# Altium PCB RobotCtrl_Base_Power.PcbDoc
Units mm, origin at the board's own origin, x right, y up, seen from the top; angles counter-clockwise.
Board outline 100 x 100 mm, 2 copper layers (Top Layer, Bottom Layer); 21 components, 7 nets, 71 pads, 82 vias.
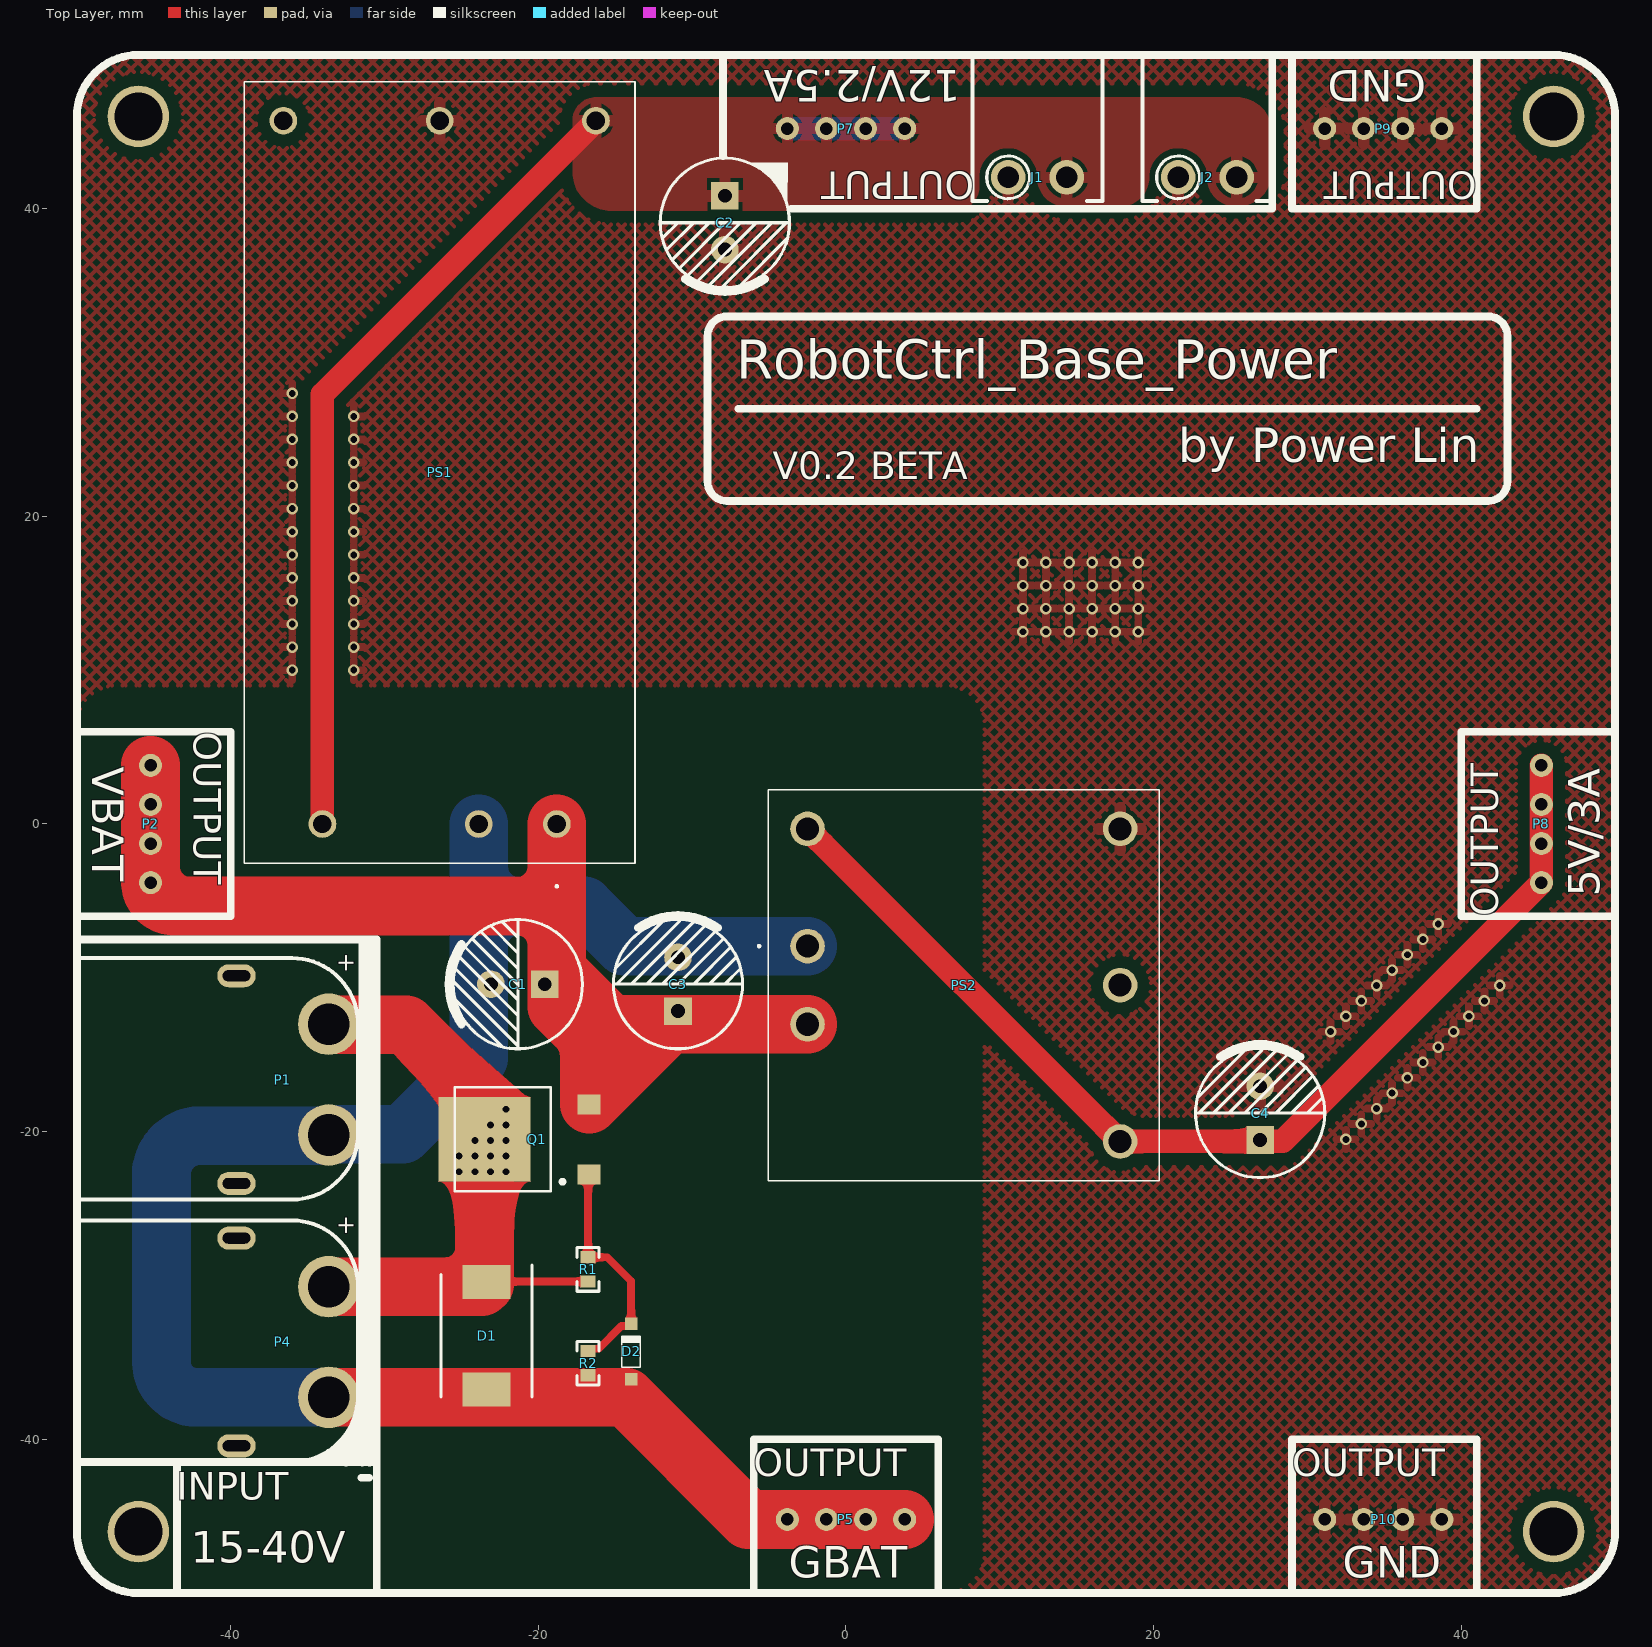
[diagram p0: Top Layer view]
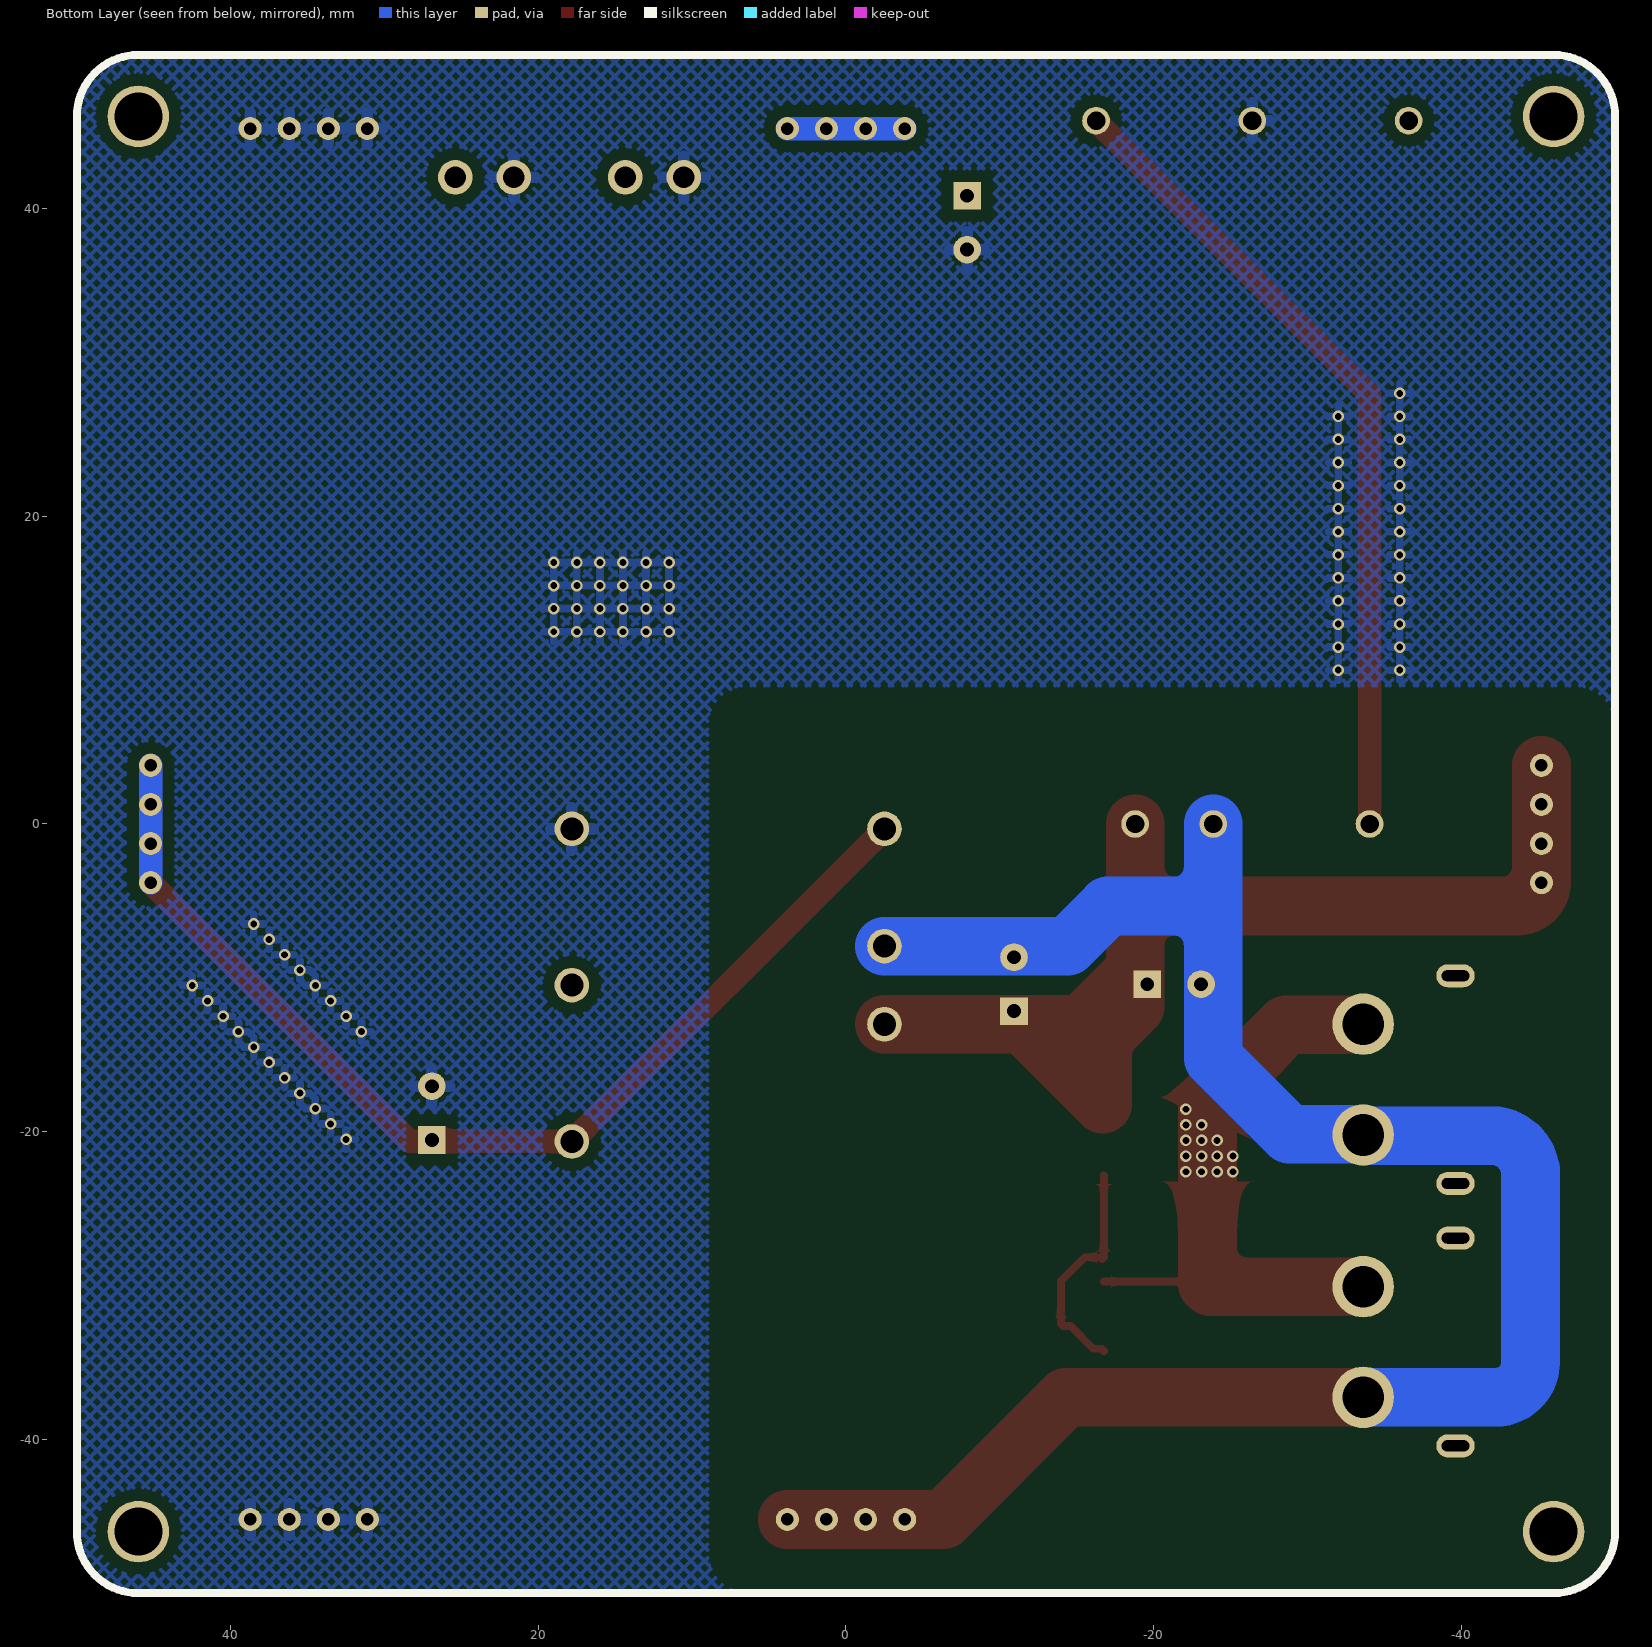
[diagram p1: Bottom Layer view, seen from below]
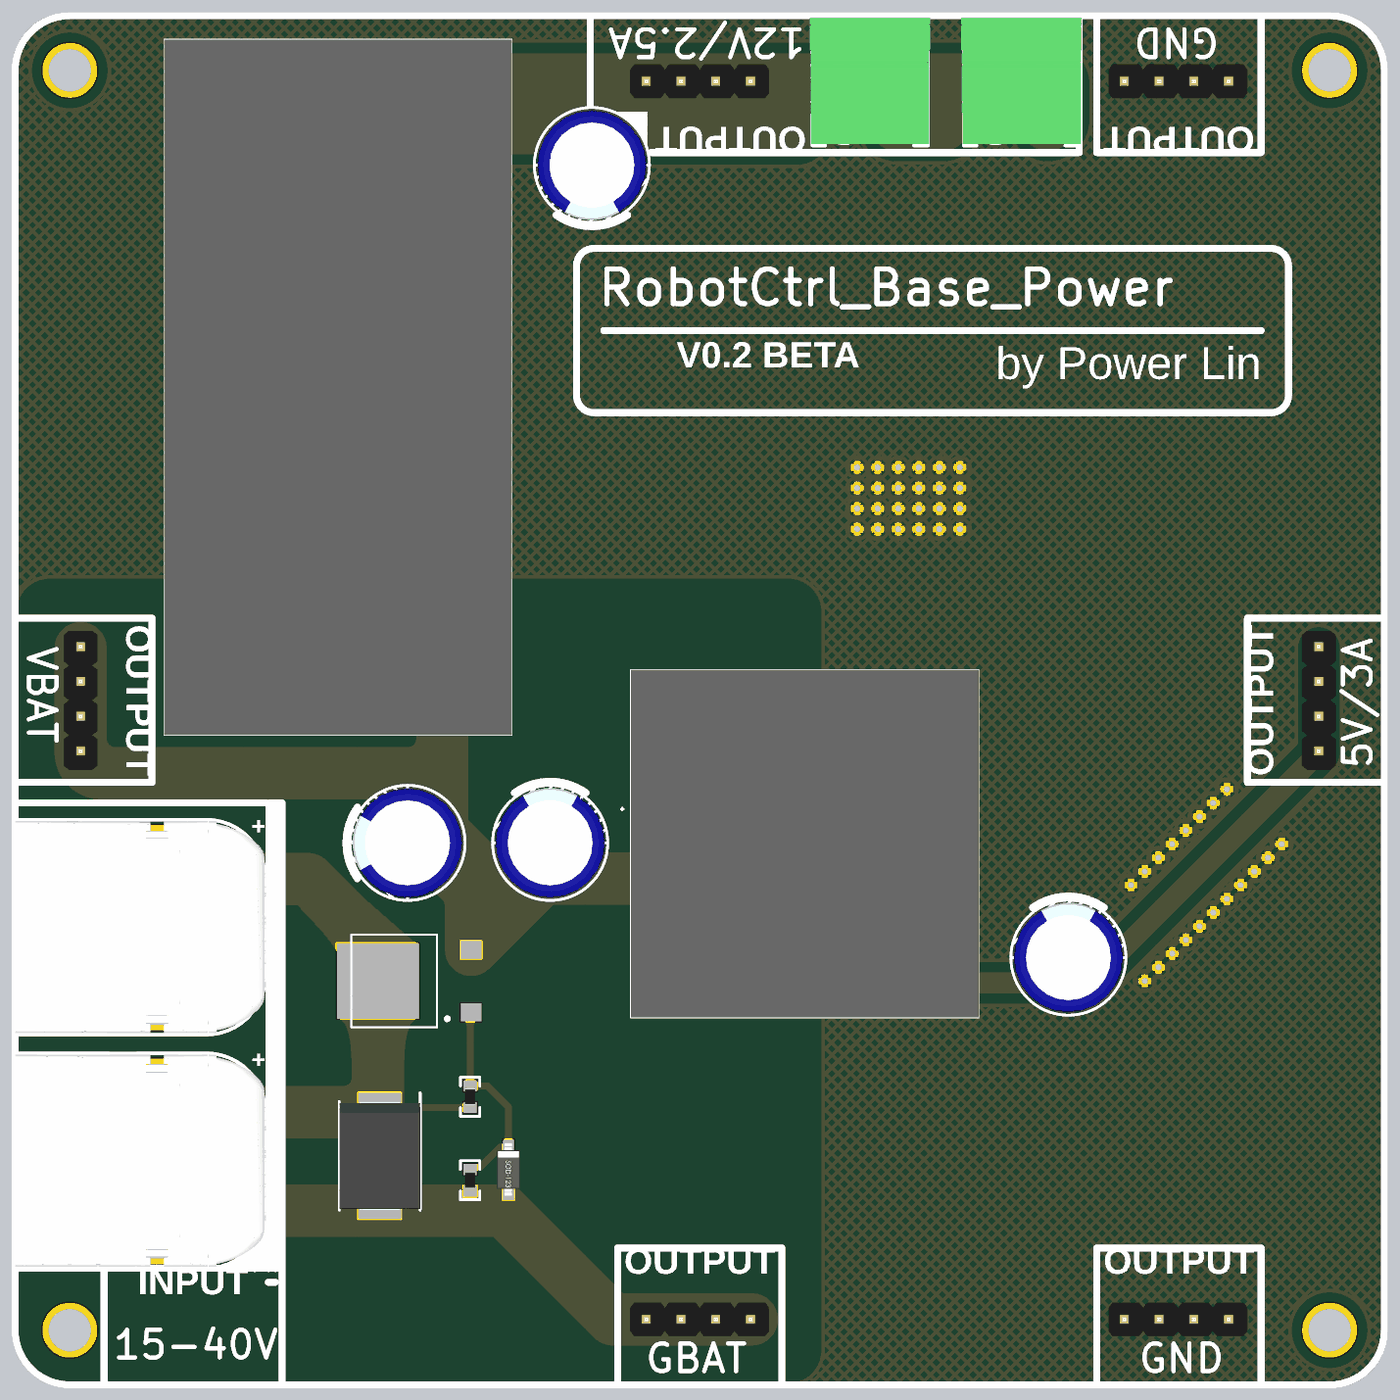
[diagram p2: 3D render of the assembled board from above, using the file's embedded part models]

## Layer stack, top to bottom
Top Solder: solder mask 0.0102, Solder Resist, Dk 3.5
Top Layer: signal copper 0.0356
Dielectric 1: dielectric 0.32, FR-4, Dk 4.8
Bottom Layer: signal copper 0.0356
Bottom Solder: solder mask 0.0102, Solder Resist, Dk 3.5

## Board outline
-50,-46 -50,46 cw(c-46,46) -46,50 46,50 cw(c46,46) 50,46 50,-46 cw(c46,-46) 46,-50 -46,-50 cw(c-46,-46)

## Design rules (kind name [scope] priority, off if disabled: settings)
Clearance [All] p1: gap=0.254 ignorepadtopadclearanceinfootprint=FALSE except(0: Arc-Hole Track-Hole SMDPad-Hole THPad-Hole Via-Hole Fill-Hole Poly-Hole Region-Hole Text-Hole; 0.762: Arc-Fill Arc-Poly Arc-Region Track-Fill Track-Poly Track-Region SMDPad-Fill SMDPad-Poly SMDPad-Region THPad-Fill THPad-Poly THPad-Region Via-Fill Via-Poly Via-Region Fill-Fill Fill-Poly Fill-Region Poly-Poly Poly-Region Region-Region)
PlaneConnect [All] p1: planeconnectstyle=Direct reliefexpansion=0.508 reliefentries=4 reliefconductorwidth=0.508 reliefairgap=0.254
PolygonConnect [All] p1: thpad.connectstyle=Relief thpad.reliefconductorwidth=0.762 thpad.reliefentries=4 thpad.polygonreliefangle="90 Angle" thpad.airgapwidth=0.254 smdpad.connectstyle=Relief smdpad.reliefconductorwidth=0.508 smdpad.reliefentries=4 smdpad.polygonreliefangle="90 Angle" smdpad.airgapwidth=0.254 via.connectstyle=Relief via.reliefconductorwidth=0.508 via.reliefentries=4 via.polygonreliefangle="90 Angle" via.airgapwidth=0.254
RoutingVias [All] p1: holewidth=0.45 width=0.75 viastyle="Through Hole" minholewidth=0.45 minwidth=0.75 maxholewidth=0.45 maxwidth=0.75
SolderMaskExpansion [All] p1: expansion=0.102 istentingtop=FALSE
Width [All] p1: maxlimit=5.08 minlimit=0.254 preferedwidth=0.254
29 further rules are at their usual default settings.

## Components (designator, comment, footprint, x,y, rotation, side; value= is the part's Value field where it differs from the comment)
C1 "100uF/63V" "CAP 3.5*8*11.5" -21.336,-10.414 r180 top
C2 "100uF/63V" "CAP 3.5*8*11.5" -7.874,39.088 r270 top
C3 "100uF/63V" "CAP 3.5*8*11.5" -10.922,-10.414 r90 top
C4 "100uF/63V" "CAP 3.5*8*11.5" 26.924,-18.796 r90 top
D1 "TPSMCJ30CA" DO-214AB/SMC -23.368,-33.274 r270 top
D2 "MMSZ5240B" SOD_123 -13.97,-34.29 r270 top
J1 "KF2EDGR-3.81-2P" "FCI 06-381-2PIN" 12.446,42.037 r0 top
J2 "KF2EDGR-3.81-2P" "FCI 06-381-2PIN" 23.495,42.037 r0 top
P1 "XT60" XT60PW-M -33.624,-20.218 r90 top
P2 "HDR1x4_2.54" HDR1x4_2.54_180 -45.212,3.81 r0 top
P4 "XT60" XT60PW-M -33.624,-37.274 r90 top
P5 "HDR1x4_2.54" HDR1x4_2.54_180 -3.81,-45.212 r90 top
P7 "HDR1x4_2.54" HDR1x4_2.54_180 -3.81,45.212 r90 top
P8 "HDR1x4_2.54" HDR1x4_2.54_180 45.212,3.81 r0 top
P9 "HDR1x4_2.54" HDR1x4_2.54_180 31.115,45.212 r90 top
P10 "HDR1x4_2.54" HDR1x4_2.54_180 31.115,-45.212 r90 top
PS1 "URB2412LD-30WR3" URB2412LD30WR3 -18.796,0 r90 top
PS2 "URB2405YMD-15WR3" URB2405YMD15WR3 -2.5,-7.938 r90 top
Q1 "NCE40P70K" TO-252 -16.7,-22.79 r180 top
R1 "10k" R-0603 -16.764,-28.956 r90 top
R2 "20k" R-0603 -16.764,-35.052 r270 top

## Footprints (in the part's own frame and the unit in brackets; to place one, negate y for a bottom-side part, rotate by r counter-clockwise, add the part's x,y. Pads: shape width x height; smd on the part's side, far side on the other; paste and mask are expansions set on the pad)
"CAP 3.5*8*11.5" [mm] "锟脚撅拷3.5mm直锟斤拷8mm锟竭讹拷11.5mm"
  rect 1.8x1.8 hole 0.9: 1(-1.75,0)
  round 1.8 hole 0.9: 2(1.75,0)
  silkscreen extent -4.2,-4.2 4.5,4.2, body extent -4,-4 4.01,4, height 11.53
DO-214AB/SMC [mm]
  rect 2.2x3.1 smd: 1(3.5,0) 2(-3.5,0)
  silkscreen extent -4.6,-2.95 3.97,2.95, body extent -3.97,-2.95 3.97,2.95, height 2.5
"FCI 06-381-2PIN" [mm] "FCI Pluggable Terminal Block"
  round 2.25 hole 1.4: 1(-1.905,0) 2(1.905,0)
  silkscreen extent -4.22,-1.52 4.22,7.87, body extent -4.4,-1.4 4.4,7.8, height 7.6
HDR1x4_2.54_180 [mm]
  round 1.5 hole 0.813: 1(0,0) 2(0,-2.54) 3(0,-5.08) 4(0,-7.62)
  body extent -1.25,-8.89 1.25,1.27, height 8.2
R-0603 [mm]
  rect 0.8x0.96 smd: 1(-0.79,0) 2(0.79,0)
  silkscreen extent -1.42,-0.71 1.42,0.71, body extent -0.76,-0.38 0.76,0.38, height 0.41
SOD_123 [mm]
  rect 0.8x0.8 smd: 1(1.8,0) 2(-1.8,0)
  silkscreen extent -1.02,-0.6 1.02,0.6, body extent -1.95,-0.85 1.9,0.85, height 1.42
TO-252 [mm] "锟斤拷片MOS锟斤拷"
  rect 1.5x1.3 smd: 1(0,0) 2(0,-4.56)
  rect 6x5.5 smd: 3(6.8,-2.29)
  silkscreen extent 1.61,-5.66 8.74,1.09, body extent -0.56,-5.65 9.54,1.08, height 2.37
URB2405YMD15WR3 [mm]
  round 2.25 hole 1.5: 1(7.62,0) 2(0,0) 3(-5.08,0) 4(-12.7,-20.32) 5(-2.54,-20.32) 6(7.62,-20.32)
  silkscreen extent -15.24,-22.86 10.16,3.2, body extent -15.24,-22.86 10.16,2.54, height 12.3
URB2412LD30WR3 [mm]
  round 1.8 hole 1.2: 1(0,15.24) 2(0,5.08) 3(0,0) 4(45.72,-2.54) 5(45.72,7.62) 6(45.72,17.78)
  silkscreen extent -4.1,-5.08 48.26,20.32, body extent -2.54,-5.08 48.26,20.32, height 16.9
XT60PW-M [mm]
  oval 1.5x2.5 hole 0.7 slot 1.8 at 90 deg: 0(-3.15,6) 0(10.35,6)
  round 4 hole 2.7: 1(7.2,0) 2(0,0)
  silkscreen extent -4.2,-1.9 11.5,16.3, body extent -4.3,-1.95 11.6,16.35, height 8.45

## Part data
C1 C2 C3 C4: library part CAP-POL, "ECR1JBK101MLL080011 / https://list.szlcsc.com/catalog/312.html?%26%7C%7C%3D%7B%22param_13003_n%22%3A%5B%22100uF%22%5D%2C%22param_13005_n%22%3A%5B%22range-60V~%22%5D%2C%22queryProductStandard%22%3A%5B%22%E5%BE%84%E5%90%91%E5%BC%95%E7%BA%BF%2C8x11.5mm%22%5D%7D%7C%7C", Package=3528, SuppliersPartNumber=C16133, ComponentLink1Description=供应商链接, ComponentLink1URL=http://www.szlcsc.com/product/details_16815.html, Supplier=LC
D1: library part TVS_C
D2: library part DIODE, "稳压 10V", Package=SMA(DO-214AC), SuppliersPartNumber=C22452, ComponentLink1Description=供应商链接, ComponentLink1URL=http://www.szlcsc.com/product/details_23178.html, Supplier=LC
J1 J2: "TERM BLOCK HDR 2POS 90DEG 3.81MM", Color=Green, Current - UL=10A, Manufacturer="Amphenol Anytek", Manufacturer Part Number=OQ0232510000G, Operating Temperature="-40°C ~ 115°C", Voltage - UL=300V, Component Type=接线端子, ComponentLink1Description=Datasheet, ComponentLink1URL=http://portal.fciconnect.com/Comergent//fci/drawing/oqxx32x100j0g.pdf, Contact Mating Finish=Tin, Header Orientation="90°, Right Angle", LastUpdated="2019-12-16 19:14:30.110", Lifecycle Status=0, Minimum Order=1, Mounting Type="Through Hole", Number of Levels=1, Number of Positions=2, Packaging=Bulk, Part Number=OQ0232510000G, Part Status=Active, Pitch="0.150\" (3.81mm)", Positions Per Level=2, Price=0.49, Series=06-381, Termination Style=Solder, Type="Header, Male Pins, Shrouded (4 Side)"
P1 P4: library part XT30/60
P2 P5 P7 P8 P9 P10: "Header"
  P7 P8 P9 P10: System=Connector
PS1: "金升阳隔离电源", Manufacturer_Name=Mornsun, Manufacturer_Part_Number=URB2412LD-30WHR3, Datasheet Link=https://4donline.ihs.com/images/VipMasterIC/IC/MNSN/MNSN-S-A0002273855/MNSN-S-A0002273855-1.pdf?hkey=EF798316E3902B6ED9A73243A3159BB0, Height=16.8mm
PS2: "金升阳隔离电源", Manufacturer_Name=Mornsun, Manufacturer_Part_Number=URB2405YMD-10WR3, Datasheet Link=https://www.mornsun-power.com/html/pdf/URB2405YMD-10WR3.html, Height=12.2mm
Q1: library part P-MOS, Case/Package=SOT23-3, Manufacturer="NCE Power", Package Description="3-Pin Small Outline Transistor, Body 2.9 x 1.3 mm, Pitch 0.95 mm", Component Type=Transistors, Datasheet URL=http://www.ncepower.com/Upload/MOSFET/mos1/55vpmos/NCE3407Adatasheet-17275285683.pdf, Datasheet Version="Rev. 1.1, 07/2014", Mounting Technology=SM, Package Reference=SOT23-3, RoHS Compliant=Unknown
R1 R2: library part RES, "贴片电阻", Package=0805, SuppliersPartNumber=C17798, Supplier=LC

## Free pads (board coordinates)
  round 4 hole 3.1: 2(-46,-46) 2(-46,46) 2(46,-46) 2(46,46)

## Via types
v1: diameter 0.75, hole 0.45, Top Layer to Bottom Layer, 82 vias

## Nets (pads, with @x,y where several pads share a name; then routed paths per layer and width w, separated by ;. In a path a pad name is that pad's centre, name@x,y a point inside that pad or via, vN(x,y) a via of type N, cw(c..) or ccw(c..) an arc to the next point about the centre after c; other vN are vias at no path point)
GBAT: C1.2 C3.2 D1.1 D2.1 P1.2 P4.2 P5.1 P5.2 P5.3 P5.4 PS1.2 PS2.2 R2.2 | length 171.4
  Top Layer w0.508: D1.1 -22.522,-35.928 -21.888,-35.928 -21.774,-35.814 -18.288,-35.814 ; R2.2@-16.91,-35.988 R2.2 R2.2@-16.761,-35.839 ; D2.1@-13.973,-36.093 D2.1
  Top Layer w3.81: P1.2@-33.66,-20.254 P1.2 ; D1.1@-22.522,-37.274 P4.2 ; -18.288,-37.274 P4.2 ; P5.4 P5.3 P5.2 P5.1 -6.35,-45.212 -14.288,-37.274 P4.2
  Bottom Layer w3.81: -38.862,-20.254 -41.96,-20.254 ; P4.2 -42.226,-37.274 cw(c-42.226,-35) -44.5,-35 -44.5,-22.794 ; PS1.2 -23.876,-2.794 ; PS2.2 -14.414,-7.938 -17.018,-5.334 -21.336,-5.334 ; -44.5,-22.794 cw(c-41.96,-22.794) -44.479,-22.465 ; -44.5,-22.794 -44.5,-22.486 -44.479,-22.465 ; -44.479,-22.465 cw(c-41.96,-22.794) -42.29,-20.276 ; -42.29,-20.276 cw(c-41.96,-22.794) -41.96,-20.254 ; -42.29,-20.276 -42.268,-20.254 -41.96,-20.254 ; -41.96,-20.254 -33.66,-20.254 P1.2 -33.588,-20.182 -28.818,-20.182 -23.876,-15.24 -23.876,-7.874 ; -23.876,-7.874 cw(c-21.336,-7.874) -21.336,-5.334 ; -23.876,-7.874 -23.876,-6.528 ; -23.876,-6.528 -23.876,-2.794 ; -23.876,-6.528 -22.682,-5.334 -21.336,-5.334 ; -23.876,-2.794 ccw(c-21.336,-2.794) -21.336,-5.334
GND: C2.2 C4.2 J1.1 J2.1 P9.1 P9.2 P9.3 P9.4 P10.1 P10.2 P10.3 P10.4 PS1.5 PS2.6
  other v1: 32.5,-20.5 33.5,-19.5 34.5,-18.5 35.5,-17.5 36.5,-16.5 37.5,-15.5 38.5,-14.5 31.5,-13.5 39.5,-13.5 32.5,-12.5 40.5,-12.5 33.5,-11.5 41.5,-11.5 34.5,-10.5 42.5,-10.5 35.5,-9.5 36.5,-8.5 37.5,-7.5 38.5,-6.5 -36,10 -32,10 -36,11.5 -32,11.5 11.5,12.5 13,12.5 14.5,12.5 16,12.5 17.5,12.5 19,12.5 -36,13 -32,13 11.5,14 13,14 14.5,14 16,14 17.5,14 19,14 -36,14.5 -32,14.5 11.5,15.5 13,15.5 14.5,15.5 16,15.5 17.5,15.5 19,15.5 -36,16 -32,16 11.5,17 13,17 14.5,17 16,17 17.5,17 19,17 -36,17.5 -32,17.5 -36,19 -32,19 -36,20.5 -32,20.5 -36,22 -32,22 -36,23.5 -32,23.5 -36,25 -32,25 -36,26.5 -32,26.5 -36,28
NetD1_2: D1.2 P1.1 P4.1 Q1.3 R1.1 | length 46.6
  Top Layer w0.508: D1.2@-23.5,-29.906 D1.2 -23.34,-29.746 R1.1
  Top Layer w3.81: P4.1 -26.04,-30.074 ; P1.1 -33.588,-13.054 -28.602,-13.054 -23.5,-18.156 Q1.3 -23.5,-27.534 ; -23.5,-25.908 -23.5,-27.534 ; -26.04,-30.074 ccw(c-26.04,-27.534) -23.5,-27.534 ; -26.04,-30.074 -23.668,-30.074 -23.5,-29.906 -23.5,-27.534
  other v1: -25.146,-22.606 -24.13,-22.606 -23.114,-22.606 -22.098,-22.606 -25.146,-21.59 -24.13,-21.59 -23.114,-21.59 -22.098,-21.59 -24.13,-20.574 -23.114,-20.574 -22.098,-20.574 -23.114,-19.558 -22.098,-19.558 -22.098,-18.542
NetD2_2: D2.2 Q1.1 R1.2 R2.1 | length 15.3
  Top Layer w0.381: Q1.1@-16.764,-22.854 Q1.1
  Top Layer w0.508: R2.1 -16.618,-34.116 -16.082,-34.116 -14.602,-32.636 -14.116,-32.636 D2.2 -13.97,-29.718 -15.522,-28.166 R1.2 ; Q1.1@-16.764,-22.854 R1.2 ; R1.2@-16.66,-28.27 R1.2
VBAT: C1.1 C3.1 P2.1 P2.2 P2.3 P2.4 PS1.3 PS2.3 Q1.2 | length 100.9
  Top Layer w3.81: P2.1 P2.2 P2.3 -45.212,-2.794 ; -39.116,-5.334 -42.672,-5.334 ; PS1.3 -18.796,-2.794 ; PS2.3 C3.1@-11.684,-13.018 ; -45.212,-2.794 ccw(c-42.672,-2.794) -42.672,-5.334 ; -45.212,-2.794 P2.4 ccw(c-43.688,-3.81) -43.688,-5.334 -42.672,-5.334 ; -42.672,-5.334 -21.336,-5.334 ; -21.336,-5.334 ccw(c-21.336,-2.794) -18.796,-2.794 ; -21.336,-5.334 cw(c-21.336,-7.874) -18.796,-7.874 ; -21.336,-5.334 -18.796,-5.334 ; C1.1@-18.796,-9.526 -18.796,-7.874 ; C1.1@-18.796,-9.526 -15.304,-13.018 ; C1.1@-18.796,-9.526 -18.796,-11.874 -17.652,-13.018 ; -18.796,-7.874 -18.796,-5.334 ; -18.796,-5.334 -18.796,-2.794 ; -17.652,-13.018 -17.444,-13.226 ; -17.652,-13.018 -15.304,-13.018 ; -17.444,-13.226 cw(c-19.24,-15.022) -16.7,-15.022 ; -17.444,-13.226 -16.7,-13.97 -16.7,-14.414 ; -16.7,-15.022 -16.7,-14.414 ; -16.7,-15.022 Q1.2 -11.684,-13.214 C3.1@-11.684,-13.018 ; -16.7,-14.414 -15.304,-13.018 ; -15.304,-13.018 C3.1@-11.684,-13.018
VCC_5V: C4.1 P8.1 P8.2 P8.3 P8.4 PS2.1 PS2.4 | length 78.3
  Top Layer w1.524: PS2.1 PS2.4 26.416,-20.638 28.384,-20.638 P8.4 P8.3 P8.2 P8.1
  Bottom Layer w1.524: P8.4 P8.3 P8.2 P8.1
VCC_12V: C2.1 J1.2 J2.2 P7.1 P7.2 P7.3 P7.4 PS1.1 PS1.4 | length 60.7
  Top Layer w1.524: PS1.1 -34.036,27.94 PS1.4
  Bottom Layer w1.524: P7.1 P7.2 P7.3 P7.4
pads on no net: P1.0 P4.0 PS1.6 PS2.5

## Polygon pours and split planes (outlines as drawn)
VCC_12V on Top Layer "NONET_L01_P-001" (solid, remove dead copper, pour order 3): 8.654,41.42 cw(c7.112,41.42) 7.112,39.878 -15.24,39.878 cw(c-15.24,42.418) -17.78,42.418 -17.78,45.72 cw(c-16.256,45.72) -16.256,47.244 25.4,47.244 cw(c25.4,44.958) 27.686,44.958 27.686,42.418 cw(c25.4,42.418) 25.4,40.132 25.382,40.132 cw(c25.382,42.037) 23.477,42.037 19.703,42.037 cw(c17.798,42.037) 17.798,40.132 14.333,40.132 cw(c14.333,42.037) 12.428,42.037 8.654,42.037
GND on Top Layer "NONET_L01_P-001" (hatched 45Degree grid 0.635 track 0.254, remove dead copper, pour order 0): -46,50 ccw(c-46,46) -50,46 -50,-46 ccw(c-46,-46) -46,-50 46,-50 ccw(c46,-46) 50,-46 50,46 ccw(c46,46) 46,50
GND on Bottom Layer "NONET_L01_P-001" (hatched 45Degree grid 0.635 track 0.254, remove dead copper, pour order 2): -46,50 ccw(c-46,46) -50,46 -50,-46 ccw(c-46,-46) -46,-50 46,-50 ccw(c46,-46) 50,-46 50,46 ccw(c46,46) 46,50

## Other copper
Top Layer:
  pour cut-out: -49.994,-47.454 ccw(c-47.454,-47.454) -47.454,-49.994 6.466,-49.994 ccw(c6.466,-47.454) 9.006,-47.454 9.006,6.466 ccw(c6.466,6.466) 6.466,9.006 -47.454,9.006 ccw(c-47.454,6.466) -49.994,6.466
Bottom Layer:
  pour cut-out: 9.006,-47.454 cw(c6.466,-47.454) 6.466,-49.994 -47.454,-49.994 cw(c-47.454,-47.454) -49.994,-47.454 -49.994,6.466 cw(c-47.454,6.466) -47.454,9.006 6.466,9.006 cw(c6.466,6.466) 9.006,6.466

## Silkscreen, mask and mechanical layers (free items; w line width, h text height)
Top Overlay:
  rectangle: -6.096,42.926 -3.809,43
  region: -4.964,42.973 -3.81,42.926 -3.793,42.972 -3.81,40.386 ccw(c-4.423,40.386) -3.99,40.82 -4.064,40.894 ccw(c-4.677,40.894) -4.244,41.328 -5.662,42.746 ccw(c-6.096,42.313) -6.096,42.926
  lines w0.508: -50,-7 -50,-7.5 -30.5,-7.5 -30.5,-50 ; -50,-6 -40,-6 -40,6 -50,6 ; -43,-50 -43.5,-50 -43.5,-41.474 -49.924,-41.474 -30.5,-41.474 ; -34.25,-41.25 -33.02,-41.25 ccw(c-33.02,-39.98) -31.75,-39.98 -31.75,-38.5 ; -32.5,-41.5 ccw(c-32.5,-40.5) -31.5,-40.5 -31.5,-37 ; -32.5,-40 cw(c-33,-40) -33,-40.5 ccw(c-33,-39.75) -32.25,-39.75 ; -32.25,-39.5 -32.25,-39.75 ; -31.75,-38.75 -31.75,-39.73 cw(c-33.02,-39.73) -33.02,-41 -33.75,-41 -33.27,-41 ccw(c-33.27,-39.73) -32,-39.73 -32,-39.25 -32,-39.5 cw(c-33.25,-39.5) -33.25,-40.75 ccw(c-33.25,-39.75) -32.25,-39.75 ; -31.5,-42.5 -31,-42.5 ; -31.445,-41.5 -31.445,-7.5 ; -30.975,-41.5 -30.975,-7.5 ; -8,43.434 -8,47.624 -8,50 ; -7,27 41,27 ; -6,-50 -6,-40 6,-40 6,-50 ; -3.556,40 27.713,40 27.713,49.911 ; 29,-50 29,-40 41,-40 41,-50 ; 29,50 29,40 41,40 41,50 ; 50,-6 40,-6 40,6 50,6 ; -50,-46 ccw(c-46,-46) -46,-50 46,-50 ccw(c46,-46) 50,-46 50,46 ccw(c46,46) 46,50 -46,50 ccw(c-46,46) -50,46 -50,-46 ; -9,22.27 ccw(c-7.73,22.27) -7.73,21 41.73,21 ccw(c41.73,22.27) 43,22.27 43,31.73 ccw(c41.73,31.73) 41.73,33 -7.73,33 ccw(c-7.73,31.73) -9,31.73 -9,30 -9,22.27
  text "12V/2.5A" at 7.448,49.016 h2.03 r180
  text "GND" at 37.708,49.016 h2.03 r180
  text "OUTPUT" at 8.331,43 h3.05 r180
  text "OUTPUT" at 41,43 h3.05 r180
  text "RobotCtrl_Base_Power" at -7.122,28.942 h2.54
  text "by Power Lin" at 21.612,22.76 h3.81
  text "V0.2 BETA" at -4.75,21.833 h3.05
  text "OUTPUT" at -43,6 h3.05 r270
  text "VBAT" at -49.016,3.724 h2.03 r270
  text "5V/3A" at 49.016,-4.74 h2.03 r90
  text "OUTPUT" at 43,-6 h3.05 r90
  text "OUTPUT" at -6,-43 h3.05
  text "OUTPUT" at 29,-43 h3.05
  text "INPUT" at -43.5,-44.5 h3.05
  text "15-40V" at -42.586,-48.016 h2.03
  text "GBAT" at -3.724,-49.016 h2.03
  text "GND" at 32.292,-49.016 h2.03
Bottom Overlay:
  the board outline again, w0.508
Mechanical 1:
  the board outline again, w0.254

## Text inside footprints (layer, text, board x,y; h text height)
P1: Top Overlay "+" at -31.624,-9.718 h2 r90
P4: Top Overlay "+" at -31.624,-26.774 h2 r90